# Altium PCB 510 FPC连接线.PcbDoc
Units mm, origin at the board's own origin, x right, y up, seen from the top; angles counter-clockwise.
Board outline 229.41 x 18.1 mm, 2 copper layers (Top Layer, Bottom Layer); 7 components, 12 nets, 67 pads, 43 vias.
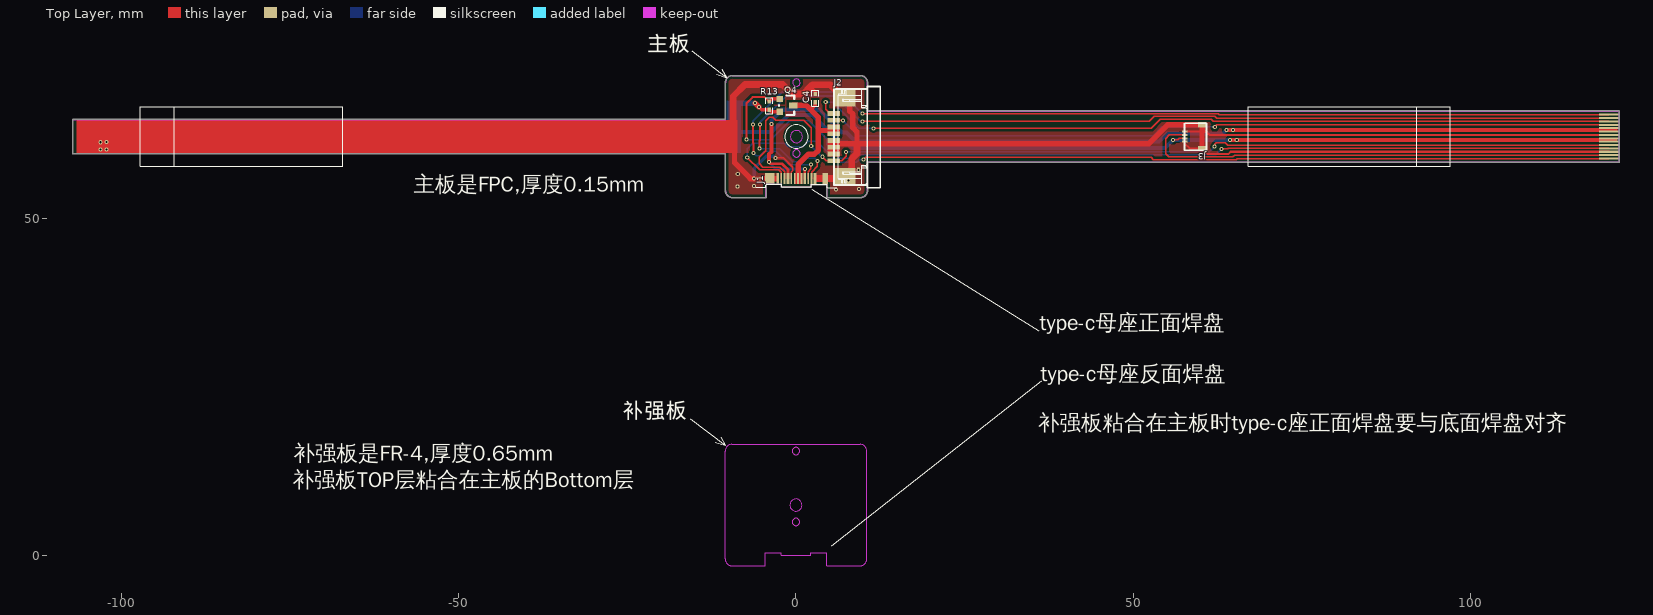
[diagram p0: Top Layer view]
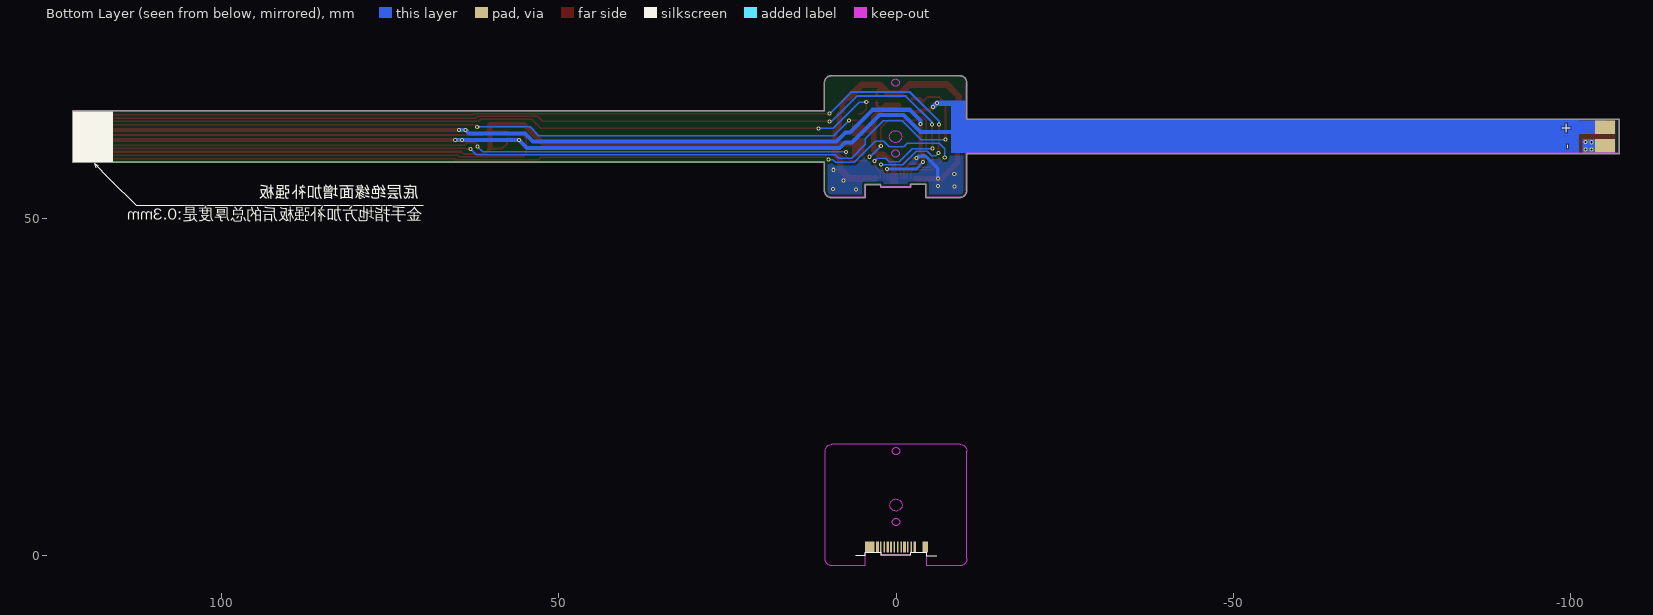
[diagram p1: Bottom Layer view, seen from below]

## Layer stack, top to bottom
Top Solder: solder mask 0.0102, Solder Resist, Dk 3.5
Top Layer: signal copper 0.0356
Dielectric 1: dielectric 0.32, FR-4, Dk 4.8
Bottom Layer: signal copper 0.0356
Bottom Solder: solder mask 0.0102, Solder Resist, Dk 3.5

## Board outline
-10.387,53.67 ccw(c-9.423,54.091) -10.143,53.324 ccw(c-9.424,54.09) -9.845,53.128 ccw(c-9.424,54.09) -9.845,53.128 ccw(c-9.424,54.089) -9.795,53.107 ccw(c-9.777,53.154) -9.795,53.107 ccw(c-9.424,54.094) -9.424,53.04 ccw(c-9.424,53.09) -9.424,53.04 -4.474,53.04 ccw(c-4.474,53.09) -4.424,53.09 -4.424,54.99 -2.153,54.99 -2.153,54.66 ccw(c-2.103,54.66) -2.138,54.624 -2.138,54.625 -2.128,54.615 -2.129,54.615 ccw(c-2.093,54.65) -2.093,54.6 2.237,54.6 ccw(c2.237,54.65) 2.288,54.65 2.288,54.981 4.575,54.981 4.575,53.09 ccw(c4.626,53.09) 4.626,53.04 9.576,53.04 ccw(c9.576,53.09) 9.576,53.04 ccw(c9.575,54.094) 9.946,53.107 ccw(c9.928,53.154) 9.946,53.107 ccw(c9.576,54.089) 9.993,53.126 ccw(c9.976,53.174) 9.996,53.127 ccw(c9.575,54.091) 10.342,53.371 ccw(c9.576,54.09) 10.538,53.669 ccw(c9.576,54.09) 10.538,53.669 ccw(c9.576,54.09) 10.559,53.719 ccw(c10.511,53.737) 10.559,53.72 ccw(c9.572,54.091) 10.626,54.09 ccw(c10.576,54.09) 10.626,54.09 10.626,58.29 122.08,58.29 ccw(c122.08,58.34) 122.13,58.34 122.13,65.84 ccw(c122.08,65.84) 122.08,65.89 10.626,65.89 10.626,70.09 ccw(c10.576,70.09) 10.626,70.09 ccw(c9.572,70.089) 10.559,70.46 ccw(c10.511,70.443) 10.559,70.461 ccw(c9.576,70.09) 10.539,70.508 ccw(c10.492,70.49) 10.538,70.51 ccw(c9.575,70.089) 10.294,70.856 ccw(c9.576,70.09) 9.996,71.052 ccw(c9.576,70.091) 9.946,71.073 ccw(c9.928,71.026) 9.946,71.073 ccw(c9.575,70.086) 9.576,71.14 ccw(c9.576,71.09) 9.576,71.14 -9.424,71.14 ccw(c-9.424,71.09) -9.424,71.14 ccw(c-9.424,70.086) -9.795,71.073 ccw(c-9.777,71.026) -9.795,71.073 ccw(c-9.424,70.091) -9.842,71.054 ccw(c-9.825,71.006) -9.845,71.053 ccw(c-9.423,70.089) -10.19,70.809 cw(c-10.154,70.774) -10.19,70.809 ccw(c-9.424,70.09) -10.387,70.511 ccw(c-10.341,70.49) -10.387,70.511 ccw(c-9.425,70.09) -10.407,70.461 ccw(c-10.36,70.443) -10.407,70.46 ccw(c-9.421,70.089) -10.475,70.09 ccw(c-10.424,70.09) -10.475,70.089 -10.475,64.64 -107.228,64.64 ccw(c-107.228,64.59) -107.278,64.59 -107.278,59.59 ccw(c-107.228,59.59) -107.228,59.54 -10.475,59.54 -10.475,54.09 ccw(c-9.421,54.091) -10.407,53.72 ccw(c-10.36,53.737) -10.407,53.719 ccw(c-9.425,54.09) -10.388,53.672 ccw(c-10.341,53.69)

## Design rules (kind name [scope] priority, off if disabled: settings)
Clearance [All] p1: gap=0.4
PolygonConnect [All] p1: connectstyle=Direct reliefconductorwidth=0.254 reliefentries=4 polygonreliefangle="90 Angle" airgapwidth=0.254
RoutingVias [All] p1: holewidth=1 width=1 viastyle="Through Hole" minholewidth=0.1 minwidth=0.1 maxholewidth=5 maxwidth=5
SolderMaskExpansion [All] p1: expansion=0.102
UnpouredPolygon [All] p1: allowunpoured=FALSE
Width [All] p1: maxlimit=5 minlimit=0.1 preferedwidth=1
29 further rules are at their usual default settings.

## Classes and differential pairs
component class FPC连接线: C4 J1 J2 J3 Q4 R13

## Components (designator, comment, footprint, x,y, rotation, side; value= is the part's Value field where it differs from the comment)
C4 "104" 0402 2.85,67.78 r270 top
J1 "HEADER 12X2" TYPE-C_JUST 0.067,55.04 r180 top locked
J1 "HEADER 12X2" TYPE-C_JUST 0,0.4 r0 bottom
J2 "AFA07-S08FCA-00" FPC-1.0MM-8P-LCS-XJ 6.387,62.01 r90 top locked
J3 "THD0509-04CL-GF" THD0509-04CL-GF 58.957,62.08 r90 top locked (schematic designator FPC1)
Q4 "AO3401" SOT-23-3 -1.39,66.727 r270 top
R13 "10K" 0402 -3.98,66.677 r270 top

## Footprints (in the part's own frame and the unit in brackets; to place one, negate y for a bottom-side part, rotate by r counter-clockwise, add the part's x,y. Pads: shape width x height; smd on the part's side, far side on the other; paste and mask are expansions set on the pad)
0402 [mil]
  rect 25x20 smd: 1(-24.1,0) 2(24.1,0)
  silkscreen extent -46,-20 46,20, body extent -19,-10 20,10, height 14
FPC-1.0MM-8P-LCS-XJ [mm]
  rect 0.7x1.8 smd: 1(-3.5,0.784) 2(-2.502,0.786) 3(-1.502,0.786) 4(-0.502,0.786) 5(0.498,0.786) 6(1.498,0.786) 7(2.498,0.786) 8(3.498,0.786)
  rect 2.6x3.3 smd: 9(5.85,-0.786) 10(-5.85,-0.786)
  silkscreen extent -7.5,-6.1 7.5,0.73
SOT-23-3 [mil]
  rect 36x36 smd: 1(-37.5,-40) 2(37.5,-40)
  rect 36x50 smd: 3(0.5,40)
  silkscreen extent -58,-45 58,45
THD0509-04CL-GF [mm]
  rect 0.3x0.8 smd: 1(-0.75,1.274) 2(-0.252,1.276) 3(0.248,1.276) 4(0.748,1.276)
  rect 0.8x1.2 smd: 5(1.75,-1.276) 6(-1.75,-1.276)
  silkscreen extent -2,-1.98 2,1.27
TYPE-C_JUST [mm]
  rect 0.4x1.6 smd: A1(2.75,-0.82) A4(1.25,-0.82) A9(-1.25,-0.82) A12(-2.75,-0.82)
  rect 0.25x1.6 smd: A2(2.25,-0.82) A3(1.75,-0.82) A5(0.75,-0.82) A6(0.25,-0.82) A7(-0.25,-0.82) A8(-0.75,-0.82) A10(-1.75,-0.82) A11(-2.25,-0.82)
  rect 0.8x1.6 smd: ""(-4.3,-0.82)
  rect 1.4x1.6 smd: ""(3.92,-0.82)
  silkscreen extent -6,0 6,0.55

## Part data
C4: library part Cap, "Capacitor"
J2: library part FPC1.0-8P
Q4: library part "MOSFET P"
R13: library part Rs

## Free pads (board coordinates)
  rect 3x0.3 smd: 1(120.58,58.84) 2(120.58,59.34) 3(120.58,59.84) 4(120.58,60.34) 5(120.58,60.84) 6(120.58,61.34) 7(120.58,61.84) 8(120.58,62.34) 9(120.58,62.84) 10(120.58,63.34) 11(120.58,63.84) 12(120.58,64.34) 13(120.58,64.84) 14(120.58,65.34)
  rect 3x2 smd far side: ""(-105.13,60.74) ""(-105.13,63.44)

## Via types
v1: diameter 0.6, hole 0.3, Top Layer to Bottom Layer, 43 vias

## Nets (pads, with @x,y where several pads share a name; then routed paths per layer and width w, separated by ;. In a path a pad name is that pad's centre, name@x,y a point inside that pad or via, vN(x,y) a via of type N, cw(c..) or ccw(c..) an arc to the next point about the centre after c; other vN are vias at no path point)
+5: J1.A4@-1.183,55.86 J1.A9@1.317,55.86 pad.9 pad.10 | length 147.6
  Top Layer w0.4: v1(-4,58.3) -3.76,58.06 -2.06,58.06 -1.183,57.183 J1.A4@-1.183,55.86 ; J1.A9@1.317,55.86 v1(1.317,57.297)
  Top Layer w0.6: v1(-4,58.3) -4,59.48 -3.65,59.83 v1(-3.65,63.98) ; v1(63.86,63.09) v1(64.83,63.09) 121.53,63.09
  Bottom Layer w0.4: v1(-4,58.3) -2.997,57.297 v1(1.317,57.297)
  Bottom Layer w0.6: v1(-3.65,63.98) -3.65,64.51 -2.09,66.07 3.52,66.07 6.865,62.725 7.475,62.725 8.82,61.38 53.85,61.38 55.04,62.57 63.34,62.57 v1(63.86,63.09) v1(64.83,63.09)
+BAT: J3.2 pad.6 pad.7 pad.@-105.13,63.44 Q4.2 R13.2 | length 154.1
  Top Layer w0.2: v1(55.91,61.59) 56.63,61.59 56.868,61.828 J3.2
  Top Layer w0.5: v1(-5.51,66.49) -5.085,66.065 R13.2 -3.69,65.775 Q4.2
  Top Layer w0.6: v1(64.35,61.59) v1@65.37,61.59 ; v1(65.38,61.6) 121.51,61.6
  Top Layer w0.8: v1(-6.07,67.05) v1(-5.51,66.49)
  Bottom Layer w0.5: -8.91,67.04 -8.9,67.05
  Bottom Layer w0.6: -11.32,64.04 -9.39,64.04 -9.202,64.228 ; -9.57,62.72 -9.54,62.75 -3.62,62.75 -1.1,65.27 2.47,65.27 6.531,61.209 7.589,61.209 8.389,60.41 54.73,60.41 v1(55.91,61.59) v1(64.35,61.59) v1@65.37,61.59
  Bottom Layer w0.8: -8.9,67.05 v1(-6.07,67.05) v1(-5.51,66.49)
  Bottom Layer w2: pad.@-105.13,63.44 -98.59,63.44
DI: J1.A2@-2.183,55.86 pad.1 | length 138.6
  Top Layer w0.2: v1(-7.22,58.98) -5.38,57.14 -2.538,57.14 -2.183,56.784 J1.A2@-2.183,55.86 ; v1(10.04,58.69) 10.34,58.99 52.7,58.99 53,58.69 65.3,58.69 65.45,58.84 pad.1
  Bottom Layer w0.2: v1(-7.22,58.98) -7.22,60.28 -6.39,61.11 -1.64,61.11 -1.11,60.58 0.98,60.58 1.8,61.4 3.06,61.4 6.17,58.29 8.97,58.29 9.37,58.69 v1(10.04,58.69)
GND: C4.1 J1.@4.367,55.86 J1.@-3.853,55.86 J1.A1@-2.683,55.86 J1.A5@-0.683,55.86 J1.A12@2.817,55.86 J2.2 J2.3 J2.4 J2.9 J2.10 J3.1 J3.4 J3.5 J3.6 pad.3 pad.8 pad.@-105.13,60.74 | length 248.5
  Top Layer w0.2: 60.233,62.855 60.26,62.828
  Top Layer w0.25: v1(-3.01,58.93) -1.85,58.93 -0.48,57.56 -0.48,57.05 -0.683,56.847 J1.A5@-0.683,55.86
  Top Layer w0.3: J3.4 60.233,62.828 ; J3.1 57.683,61.047 58.4,60.33 J3.6 61.023,59.54 64.19,59.54 64.49,59.84 pad.3 ; 60.26,62.828 60.852,62.828 61.34,62.34 pad.8
  Top Layer w0.5: 2.105,69.415 2.175,69.415 2.85,68.74 C4.1
  Top Layer w0.8: -9.11,60.67 -9.11,58.22 -6.75,55.86 -3.853,55.86 -2.913,55.86 ; 5.36,61.008 9.06,61.008 ; J2.9 8.01,67.023 8.01,65.85 8.44,65.42 8.44,63.42 9.06,62.8 9.06,61.008 ; 9.06,60.85 9.06,61.008 ; J3.6 60.233,62.828 60.233,62.855 ; J3.5 55.14,63.83 52.318,61.008 9.06,61.008 ; 60.26,62.828 J3.5@60.26,63.803
  Top Layer w1: -9.3,63.8 -9.3,68.07 -7.56,69.81 -1.97,69.81 -0.55,68.39 1.08,68.39 2.105,69.415 2.48,69.79 5.07,69.79 7,67.86 J2.9 ; 3.12,55.86 4.367,55.86 J2.10@6.873,55.86 ; J2.10 8.27,57.257 8.27,58.78 9.06,59.57 9.06,60.85
  Bottom Layer w0.5: v1(-6.2,55.87) -6.2,57.42 -4.43,59.19 -3.27,59.19 v1(-3.01,58.93)
  other v1: 5.93,54.27 9.33,54.29 -8.69,54.69 -6.21,54.73 7.77,55.58 -8.63,56.51 9.31,57.17 -103.17,60.2 -102.26,60.2 -103.17,61.25 -102.25,61.27
HEAT: pad.4 Q4.1 R13.1 | length 143.6
  Top Layer w0.2: v1(63.14,60.26) 64.05,60.26 64.13,60.34 pad.4
  Top Layer w0.3: v1(-7.36,61.64) -7.36,67 -6.41,67.95 -4.641,67.95 R13.1
  Top Layer w0.5: R13.1 -3.59,67.68 Q4.1
  Bottom Layer w0.2: v1(-7.36,61.64) -3.7,61.64 -0.91,64.43 1.88,64.43 4.54,61.77 4.54,60.96 6.59,58.91 8.51,58.91 9.01,59.41 62.29,59.41 v1(63.14,60.26)
HOUT+: C4.2 J1.A6@-0.183,55.86 J1.A7@0.317,55.86 J1.A8@0.817,55.86 J2.5 J2.6 Q4.3 | length 18.4
  Top Layer w0.5: 2.19,66.08 2.85,66.74 C4.2
  Top Layer w0.8: Q4.3 1.555,66.715 2.19,66.08 3.33,64.94 3.33,60.06 2.76,59.49 2.17,59.49 1.87,59.49 0.317,57.937 0.317,57.637 J1.A7@0.317,55.86 ; 3.38,62.99 5.15,62.99
HS: J3.3 pad.2 | length 71.3
  Top Layer w0.2: J3.3 55.378,62.328 54.83,61.78 54.83,59.58 55.32,59.09 64.81,59.09 65.06,59.34 pad.2
NTC+: J1.A3@-1.683,55.86 J2.1 pad.5 | length 143.4
  Top Layer w0.2: J1.A3@-1.683,55.86 -1.683,56.85 -2.373,57.54 -4.9,57.54 -5.46,58.1 -5.46,59 -4.49,59.97 -4.49,64.45 -3.99,64.95 -3.42,64.95 -3,64.53 1.13,64.53 2.27,63.39 v1(2.27,60.69) ; v1(3.93,59.1) 4.52,58.51 J2.1 6.78,58.51 7.44,59.17 v1(7.44,59.8) ; v1(62.11,60.6) 62.11,60.92 62.37,61.18 63.69,61.18 64.03,60.84 pad.5
  Bottom Layer w0.2: v1(2.27,60.69) 3.86,59.1 v1(3.93,59.1) ; v1(7.44,59.8) 7.45,59.81 61.32,59.81 v1(62.11,60.6)
OUTA: J2.7 pad.11 | length 116.6
  Top Layer w0.2: J2.7 5.603,64.51 v1(6.95,64.51) ; v1(62.12,63.52) 62.44,63.84 pad.11
  Bottom Layer w0.2: v1(6.95,64.51) 9.23,62.23 53,62.23 54.29,63.52 v1(62.12,63.52)
OUTB: J2.8 pad.12 | length 121
  Top Layer w0.2: v1(4.42,67.2) 4.42,66.15 5.062,65.508 J2.8 ; v1(11.51,63.31) 52.68,63.31 54.06,64.69 61.57,64.69 61.92,64.34 pad.12
  Bottom Layer w0.2: v1(4.42,67.2) 5.43,67.2 9.32,63.31 v1(11.51,63.31)
OUTC: J1.A11@2.317,55.86 pad.13 | length 146.1
  Top Layer w0.2: J1.A11@2.317,55.86 2.317,56.837 3.17,57.69 v1(3.17,58.44) ; v1(9.88,64.36) 52.42,64.36 53.15,65.09 62.14,65.09 62.39,64.84 pad.13
  Top Layer w0.3: v1(-5.41,60.32) -5.41,61.47 -5.33,61.55 v1(-5.33,63.9)
  Bottom Layer w0.2: v1(-5.41,60.32) -2.41,60.32 -0.44,58.35 1,58.35 1.5,58.85 2.76,58.85 v1(3.17,58.44)
  Bottom Layer w0.3: v1(-5.33,63.9) -5.33,64.21 -1.44,68.1 5.82,68.1 9.56,64.36 v1(9.88,64.36)
OUTD: J1.A10@1.817,55.86 pad.14 | length 146.9
  Top Layer w0.2: J1.A10@1.817,55.86 1.817,56.907 2.21,57.3 v1@2.21,57.94 ; v1(9.86,65.49) 10.62,65.49 62.64,65.49 62.79,65.34 pad.14
  Top Layer w0.3: v1(-6.38,63.91) -6.38,61.19 -6.32,61.13 v1(-6.32,59.65)
  Bottom Layer w0.2: v1(-6.32,59.65) -5.92,59.25 -5.26,59.25 -4.6,59.91 -2.96,59.91 -1,57.95 v1(2.21,57.95)
  Bottom Layer w0.3: v1(-6.38,63.91) -6.38,64.38 -2.07,68.69 6.66,68.69 v1(9.86,65.49)
pads on no net: J1.@3.92,1.22 J1.@-4.3,1.22 J1.A1@2.75,1.22 J1.A2@2.25,1.22 J1.A3@1.75,1.22 J1.A4@1.25,1.22 J1.A5@0.75,1.22 J1.A6@0.25,1.22 J1.A7@-0.25,1.22 J1.A8@-0.75,1.22 J1.A9@-1.25,1.22 J1.A10@-1.75,1.22 J1.A11@-2.25,1.22 J1.A12@-2.75,1.22

## Polygon pours and split planes (outlines as drawn)
GND on Top Layer "Top Layer-No Net" (solid, remove dead copper, pour order 9): -9.562,71.131 122.069,71.131 122.08,71.12 122.08,53.09 -10.42,53.09 -10.42,71.13 -10.419,71.131 -9.562,71.131
GND on Bottom Layer "Top Layer-No Net" (solid, remove dead copper, pour order 11): -10.42,71.13 122.08,71.13 122.08,53.09 -10.43,53.09 -10.43,71.13

## Keep-outs
Keep-Out Layer:
  circle w0.1: c0.076,62.09 r0.9
  circle w0.1: c0.006,7.44 r0.9
  lines w0.1: -10.411,-0.96 ccw(c-9.493,-0.559) -10.179,-1.289 ccw(c-9.494,-0.56) -9.895,-1.476 ccw(c-9.494,-0.561) -9.847,-1.496 ccw(c-9.494,-0.556) -9.494,-1.56 -4.544,-1.56 -4.544,-0.11 -4.544,0.382 -4.536,0.39 -2.173,0.39 -2.173,0.01 -2.163,0 2.167,0 2.167,0.37 2.179,0.382 4.556,0.382 4.556,-0.11 4.556,-1.56 9.506,-1.56 ccw(c9.505,-0.556) 9.858,-1.496 ccw(c9.506,-0.561) 9.906,-1.476 ccw(c9.505,-0.559) 10.235,-1.244 ccw(c9.506,-0.56) 10.422,-0.96 ccw(c9.506,-0.56) 10.441,-0.913 ccw(c9.502,-0.559) 10.506,-0.56 10.506,3.69 ; -10.411,-0.96 cw(c-9.495,-0.56) -10.43,-0.913 cw(c-9.491,-0.559) -10.494,-0.56 -10.494,4.94 -10.494,9.94 -10.494,15.44 cw(c-9.491,15.439) -10.43,15.793 cw(c-9.495,15.44) -10.411,15.84 cw(c-9.494,15.44) -10.224,16.124 cw(c-9.493,15.439) -9.895,16.356 cw(c-9.494,15.441) -9.847,16.376 cw(c-9.494,15.436) -9.494,16.44 9.506,16.44 cw(c9.505,15.436) 9.858,16.376 cw(c9.506,15.441) 9.906,16.356 cw(c9.506,15.44) 10.19,16.169 cw(c9.505,15.439) 10.422,15.84 cw(c9.506,15.44) 10.441,15.793 cw(c9.502,15.439) 10.506,15.44 10.506,11.19 10.506,3.66 ; 10.492,70.49 cw(c9.576,70.09) 10.511,70.443 cw(c9.572,70.089) 10.576,70.09 10.576,65.84 122.08,65.84 122.08,58.34 10.576,58.34 10.576,54.09 cw(c9.572,54.091) 10.511,53.737 cw(c9.576,54.09) 10.492,53.69 cw(c9.576,54.09) 10.305,53.406 cw(c9.575,54.091) 9.976,53.174 cw(c9.576,54.089) 9.928,53.154 cw(c9.575,54.094) 9.576,53.09 4.626,53.09 4.626,54.54 4.626,55.032 2.249,55.032 2.237,55.02 2.237,54.65 -2.093,54.65 -2.103,54.66 -2.103,55.04 -4.466,55.04 -4.474,55.032 -4.474,54.54 -4.474,53.09 -9.424,53.09 cw(c-9.424,54.094) -9.777,53.154 cw(c-9.424,54.089) -9.825,53.174 cw(c-9.424,54.09) -10.109,53.361 cw(c-9.423,54.091) -10.341,53.69 cw(c-9.425,54.09) -10.36,53.737 cw(c-9.421,54.091) -10.424,54.09 -10.424,59.59 -107.228,59.59 -107.228,64.59 -10.424,64.59 -10.424,70.09 cw(c-9.421,70.089) -10.36,70.443 cw(c-9.425,70.09) -10.341,70.49 cw(c-9.424,70.09) -10.154,70.774 cw(c-9.423,70.089) -9.825,71.006 cw(c-9.424,70.091) -9.777,71.026 cw(c-9.424,70.086) -9.424,71.09 9.576,71.09 cw(c9.575,70.086) 9.928,71.026 cw(c9.576,70.091) 9.976,71.006 cw(c9.576,70.09) 10.26,70.819 cw(c9.575,70.089) 10.492,70.49 ; -0.544,4.94 cw(c0.006,4.94) 0.556,4.94 cw(c0.006,4.94) -0.544,4.94 ; -0.544,15.44 cw(c0.006,15.44) 0.556,15.44 cw(c0.006,15.44) -0.544,15.44 ; -0.474,59.59 ccw(c0.076,59.59) 0.626,59.59 ccw(c0.076,59.59) -0.474,59.59 ; -0.474,70.09 ccw(c0.076,70.09) 0.626,70.09 ccw(c0.076,70.09) -0.474,70.09

## Other copper
Top Layer:
  rectangle net HOUT+: -0.31,55.06 0.94,56.66
  rectangle net HOUT+: 4.71,62.16 6.52,63.86
  rectangle net GND: 4.7,59.16 6.5,61.86
  rectangle net GND: -106.67,59.64 -8.66,64.54
  pour cut-out: -1.94,62.09 ccw(c0.06,62.09) 0.06,60.09 ccw(c0.06,62.09) 2.06,62.09 ccw(c0.06,62.09) 0.06,64.09 ccw(c0.06,62.09)
Bottom Layer:
  rectangle net +BAT: -10.29,62.34 -8.16,67.46
  rectangle net GND: -106.64,59.73 -101.79,61.74
  rectangle net +BAT: -101.27,59.64 -8.17,64.54

## Silkscreen, mask and mechanical layers (free items; w line width, h text height)
Top Overlay:
  circle w0.1: c0.076,62.09 r1.75
  lines w0.1: -92.228,57.69 -92.228,66.49 ; -92.228,58.34 -92.228,65.84 ; -15.66,20.27 -10.46,16.28 ; -15.47,74.84 -10.27,70.85 ; -11.94,16.77 -10.46,16.28 ; -11.75,71.34 -10.27,70.85 ; -11.18,17.53 -10.46,16.28 ; -10.99,72.1 -10.27,70.85 ; 2.34,54.31 36.03,33.33 ; 5.33,1.4 36.48,25.91 ; 6.326,55.94 6.326,55.74 6.776,55.74 6.776,55.24 6.976,55.24 6.976,55.74 7.276,55.74 7.276,55.24 7.476,55.24 7.476,55.94 ; 6.326,68.24 6.326,68.44 6.776,68.44 6.776,68.94 6.976,68.94 6.976,68.44 7.276,68.44 7.276,68.94 7.476,68.94 7.476,68.24 ; 7.076,56.54 7.076,56.84 ; 7.076,67.34 7.076,67.64 ; 7.976,56.84 7.976,56.647 9.776,56.647 ; 7.976,67.34 7.976,67.533 9.776,67.533 ; 9.726,56.447 9.776,56.447 ; 9.726,67.733 9.776,67.733 ; 9.776,56.84 7.026,56.84 ccw(c7.026,56.69) 7.026,56.54 9.726,56.54 9.726,55.94 6.276,55.94 6.276,68.24 9.726,68.24 9.726,67.64 7.026,67.64 ccw(c7.026,67.49) 7.026,67.34 9.776,67.34 ; 9.776,57.465 10.576,57.465 10.276,57.765 9.776,57.765 ; 9.776,66.415 10.276,66.415 10.576,66.715 9.776,66.715 ; 10.576,57.965 10.276,57.815 9.776,57.815 9.776,55.04 10.276,55.04 ccw(c10.276,55.34) 10.576,55.34 10.576,66.215 ; 92.08,57.69 92.08,66.49 ; 92.08,58.34 92.08,65.84 ; 10.576,66.215 10.576,68.84 ccw(c10.276,68.84) 10.276,69.14 9.776,69.14 9.776,66.365 10.276,66.365 10.576,66.215 ; -97.228,57.69 -67.228,57.69 -67.228,66.49 -97.228,66.49 -97.228,57.69 ; 57.626,60.09 60.876,60.09 60.876,64.09 57.626,64.09 57.626,60.09 ; 67.08,57.69 97.08,57.69 97.08,66.49 67.08,66.49 67.08,57.69
  text "主板" at -22.08,73.92 h4
  text "主板是FPC,厚度0.15mm" at -56.68,53.1 h4
  text "type-c母座正面焊盘" at 36.16,32.55 h4
  text "type-c母座反面焊盘" at 36.33,25.01 h4
  text "补强板" at -25.7,19.49 h4
  text "补强板粘合在主板时type-c座正面焊盘要与底面焊盘对齐" at 35.96,17.72 h4
  text "补强板是FR-4,厚度0.65mm" at -74.5,13.21 h4
  text "补强板TOP层粘合在主板的Bottom层" at -74.61,9.27 h4
Bottom Overlay:
  rectangle: 116.112,58.33 122.112,65.83
  lines w0.1: 70.12,51.805 112.637,51.805 116.632,55.8 118.862,58.03 ; 118.312,57.76 118.862,58.03 ; 118.602,57.5 118.862,58.03
  text "+" at -100.28,62.68 h1.52
  text "-" at -99.05,60.18 h1.52 r90
  text "底层绝缘面增加补强板" at 70.77,52.405 h3
  text "金手指地方加补强板后的总厚度是:0.3mm" at 70.295,49.155 h3